# Altium PCB ESP32_GRBL_3Axis_E0.4_2021-05-28.pcbdoc (part 1 of 2)
Units mil, origin at the board's own origin, x right, y up, seen from the top; angles counter-clockwise.
Board outline 5724.41 x 4938.03 mil, 2 copper layers (Top Layer, Bottom Layer); 111 components, 119 nets, 457 pads, 133 vias.
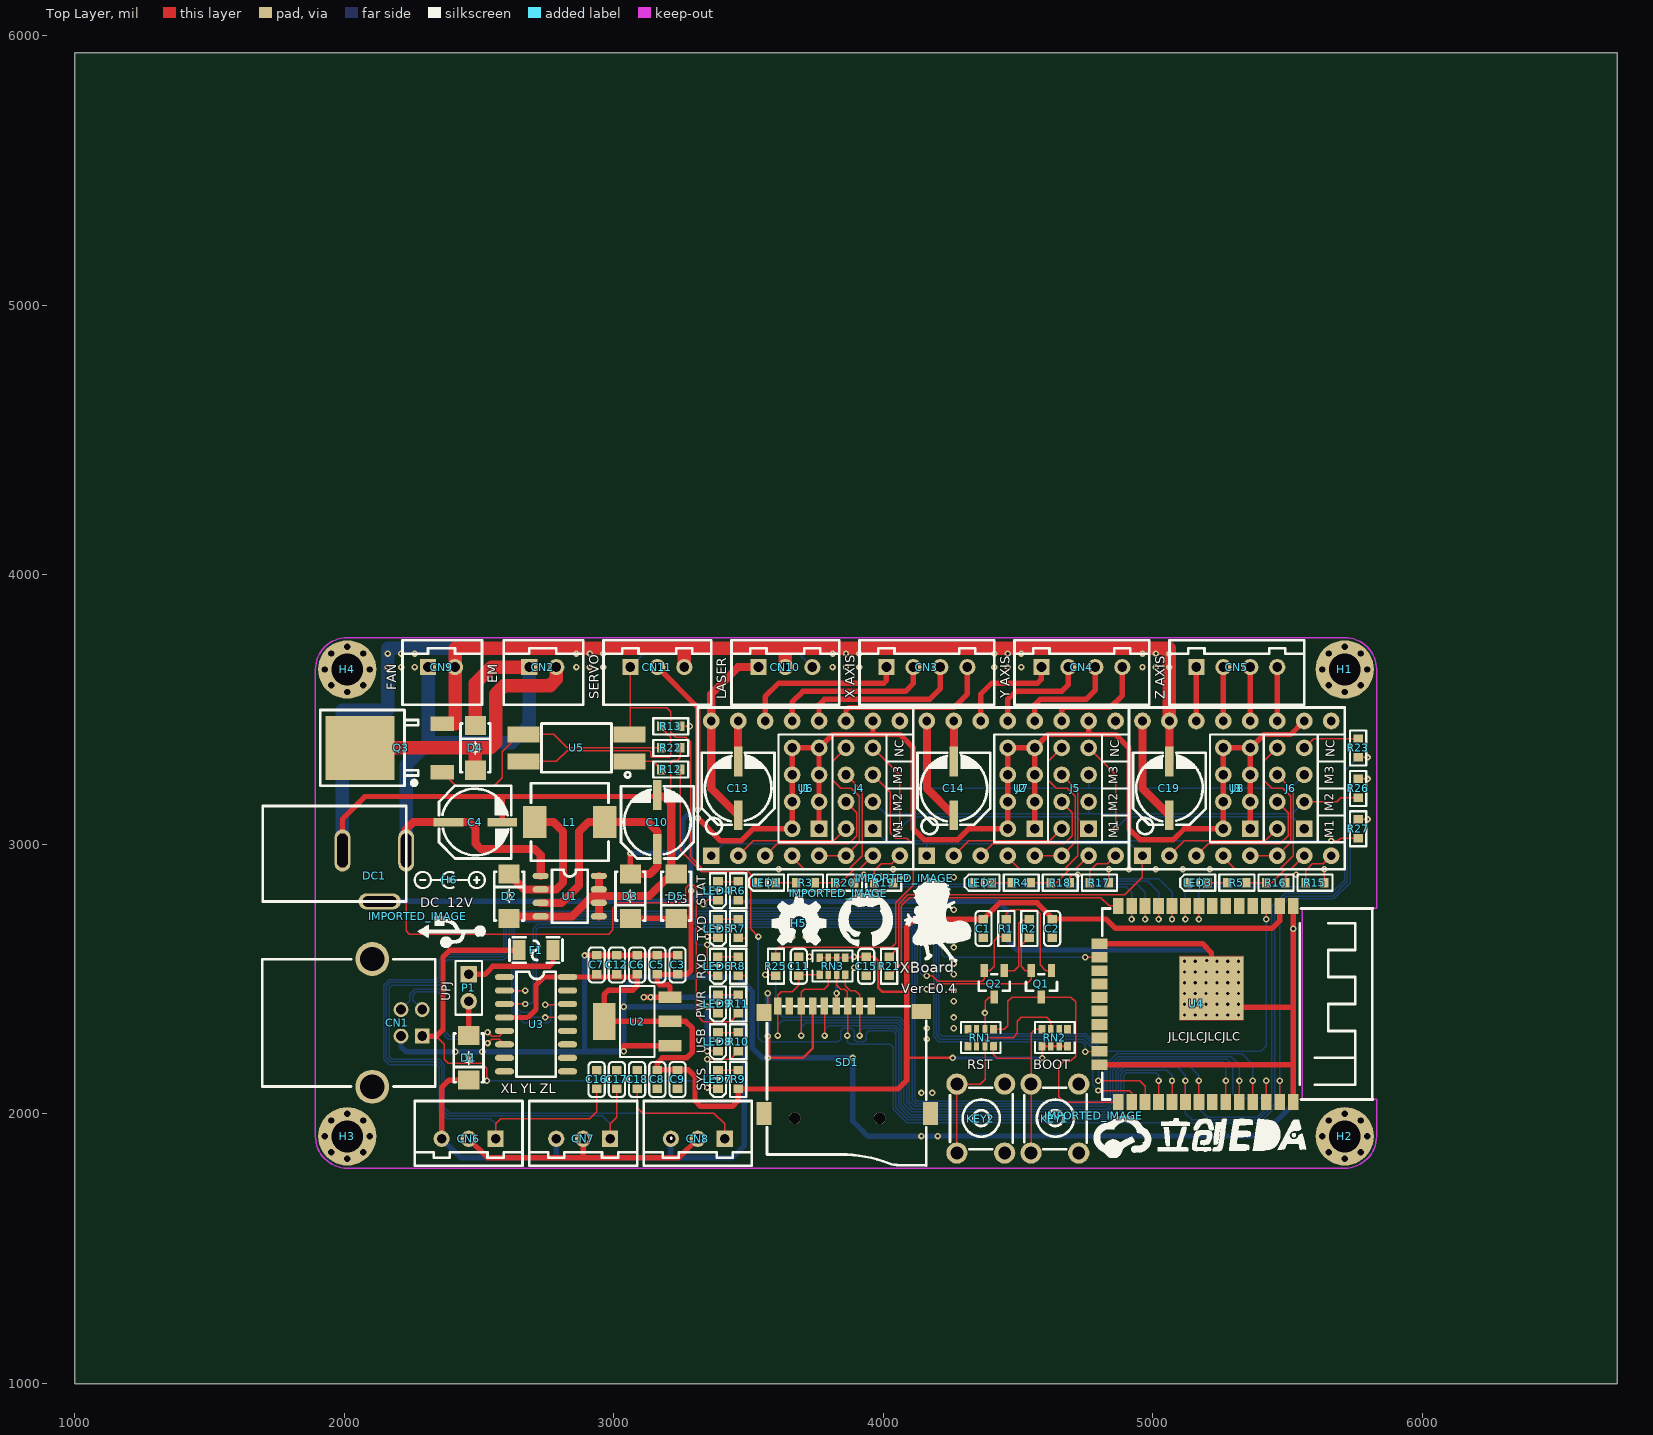
[diagram p0: Top Layer view]
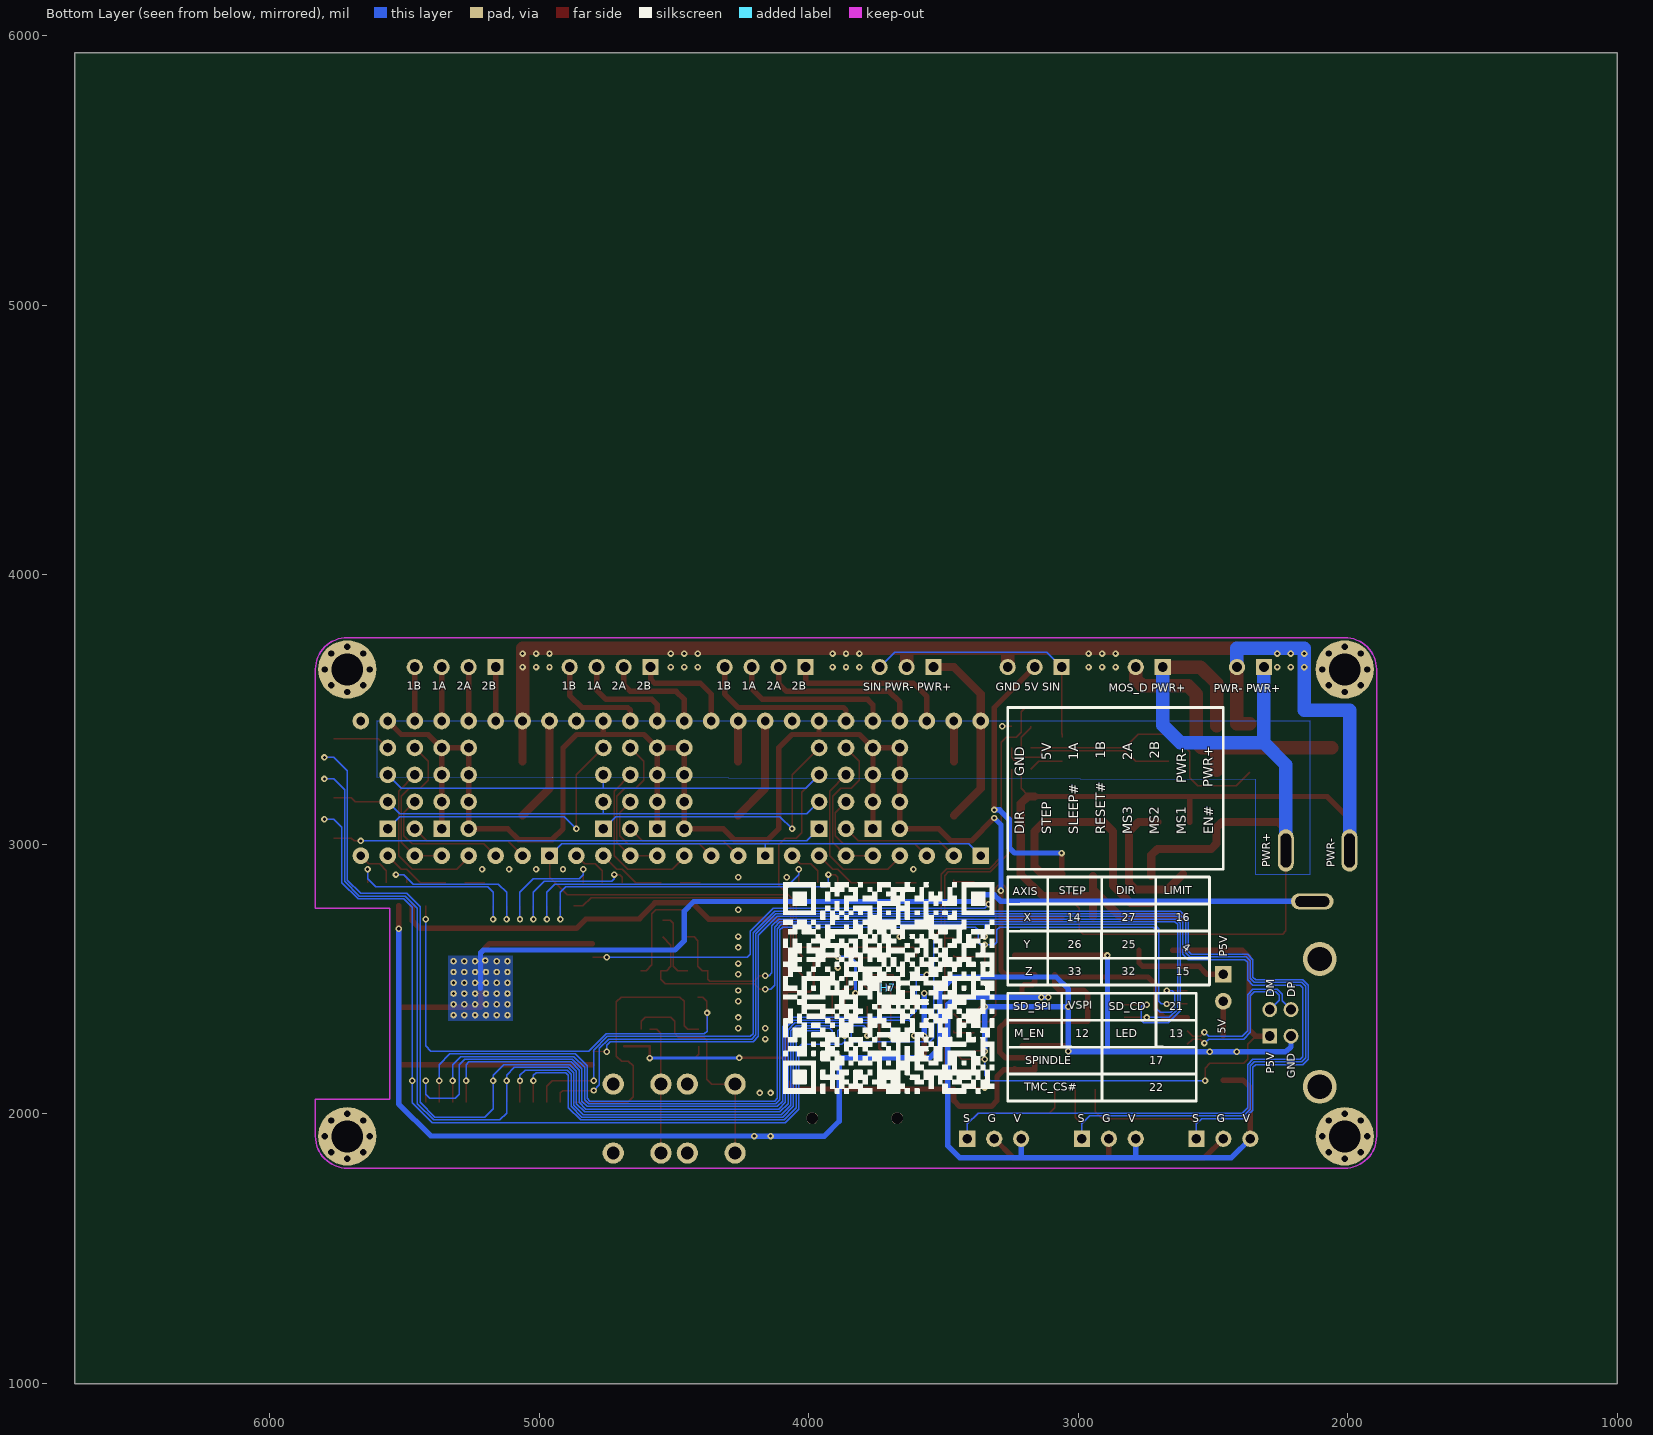
[diagram p1: Bottom Layer view, seen from below]

## Layer stack, top to bottom
Top Layer: signal copper (thickness not stored)
Dielectric: dielectric 12.6, FR-4, Dk 4.8
Bottom Layer: signal copper (thickness not stored)

## Board outline
6724.41,1000 1000,1000 1000,5938.03 6724.41,5938.03

## Components (designator, comment, footprint, x,y, rotation, side; value= is the part's Value field where it differs from the comment)
C1 "10uF" C0603 4372.25,2688.03 r270 top
C2 "104" C0603 4627.25,2688.03 r270 top
C3 "10uF" C0603 3237.25,2553.03 r270 top
C4 "100uF(35V)" CAP-D6.3XH5.5 2487.21,3083.03 r180 top
C5 "104" C0603 3162.25,2553.03 r270 top
C6 "10uF" C0603 3087.25,2553.03 r270 top
C7 "104" C0603 2937.21,2553.08 r270 top
C8 "10uF" C0603 3162.15,2128.13 r90 top
C9 "104" C0603 3237.15,2128.13 r90 top
C10 "180uF(16V)" CAP-D6.3XH5.5 3162.21,3083.03 r270 top
C11 "104" C0603 3687.25,2548.03 r270 top
C12 "1uF" C0603 3012.21,2553.08 r270 top
C13 "100uF(35V)" CAP-D6.3XH5.5 3462.21,3208.03 r270 top
C14 "100uF(35V)" CAP-D6.3XH5.5 4262.21,3208.03 r270 top
C15 "104" C0603 3937.25,2548.03 r90 top
C16 "104" C0603 2937.25,2128.03 r270 top
C17 "104" C0603 3012.25,2128.03 r270 top
C18 "104" C0603 3087.15,2128.13 r270 top
C19 "100uF(35V)" CAP-D6.3XH5.5 5062.21,3208.03 r270 top
CN1 "USB-BF90" USB-B_4PIN-FEMALE_BF90 2197.19,2338.04 r180 top
CN2 "XH2.54-2A" XH2.54-2A 2737.21,3658.03 r0 top
CN3 "XH2.54-4AW" XH2.54-4A 4162.21,3658.03 r0 top
CN4 "XH2.54-4AW" XH2.54-4A 4737.21,3658.03 r0 top
CN5 "XH2.54-4AW" XH2.54-4A 5312.21,3658.03 r0 top
CN6 "XH2.54-3A" XH2.54-3A 2462.21,1908.03 r180 top
CN7 "XH2.54-3A" XH2.54-3A 2887.21,1908.03 r180 top
CN8 "XH2.54-3A" XH2.54-3A 3312.21,1908.03 r180 top
CN9 "XH2.54-2A" XH2.54-2A 2361.51,3658.03 r0 top
CN10 "XH2.54-3A" XH2.54-3A 3637.21,3658.03 r0 top
CN11 "XH2.54-3A" XH2.54-3A 3162.21,3658.03 r0 top
D1 "SS34" SMA_L4.4-W2.8-LS5.4-RD 2462.21,2208.03 r90 top
D2 "SS34" SMA_L4.4-W2.8-LS5.4-RD 2612.21,2808.07 r270 top
D3 "SS34" SMA_L4.4-W2.8-LS5.4-RD 3062.21,2808.07 r90 top
D4 "SS34" SMA_L4.4-W2.8-LS5.4-RD 2487.21,3358.07 r270 top
D5 "SMAJ5.0A" SMAJ5.0A 3232.21,2808.08 r0 top
DC1 "DC005" DC-IN-TH_DC-005 2112.22,2883.04 r0 top
F1 "FSMD012-1206-R" F1206 2712.21,2608.08 r0 top
H1 "安装孔" M3定位孔_2020年6月11日 5712.61,3649.23 r0 top
H2 "安装孔" M3定位孔_2020年6月11日 5712.61,1916.93 r0 top
H3 "安装孔" M3定位孔_2020年6月11日 2011.81,1916.93 r0 top
H4 "安装孔" M3定位孔_2020年6月11日 2011.81,3649.23 r0 top
H5 "OSHW" OSHW_TS 3687.21,2708.03 r0 top
H6 "DC" DC_LOGO 2392.21,2868.08 r0 top
H7 "QR" XBOARD交流群二维码 3704.72,2468.12 r0 bottom
IMPORTED_IMAGE "IMPORTED_IMAGE" IMPORTED_IMAGE 2272.64,2734.4 r0 top
IMPORTED_IMAGE "IMPORTED_IMAGE" IMPORTED_IMAGE 4078.32,2875.28 r0 top
IMPORTED_IMAGE "IMPORTED_IMAGE" IMPORTED_IMAGE 4781.42,1993.58 r0 top
IMPORTED_IMAGE "IMPORTED_IMAGE" IMPORTED_IMAGE 3834.3,2819.34 r0 top
J1 "HDR-M-2.54_2x4" HDR-M-2.54_2X4 3712.21,3208.03 r90 top
J2 "HDR-M-2.54_2x4" HDR-M-2.54_2X4 4512.21,3208.03 r90 top
J3 "HDR-M-2.54_2x4" HDR-M-2.54_2X4 5312.21,3208.03 r90 top
J4 "HDR-M-2.54_2x4" HDR-M-2.54_2X4 3912.21,3208.03 r90 top
J5 "HDR-M-2.54_2x4" HDR-M-2.54_2X4 4712.21,3208.03 r90 top
J6 "HDR-M-2.54_2x4" HDR-M-2.54_2X4 5512.21,3208.03 r90 top
KEY1 "button6*6*8.5" KEY-TH_4P-L6.0-W6.0-P4.50 4637.21,1983.08 r270 top
KEY2 "button6*6*8.5" KEY-TH_4P-L6.0-W6.0-P4.50 4362.21,1983.08 r270 top
L1 "68uH" L-SMD-7.3X7.3 2837.21,3083.07 r0 top
LED1 "LED-0603_Violet" LED0603_VIOLET 3567.21,2858.08 r180 top
LED2 "LED-0603_Violet" LED0603_VIOLET 4367.21,2858.08 r180 top
LED3 "LED-0603_Violet" LED0603_VIOLET 5167.21,2858.08 r180 top
LED4 "LED-0603_R" LED0603_RED 3387.24,2828.1 r270 top
LED5 "LED-0603_G" LED0603_GREEN 3387.24,2688.1 r270 top
LED6 "LED-0603_Y" LED0603_YELLOW 3387.21,2548.08 r270 top
LED7 "LED-0603_B" LED0603_BLUE 3387.24,2128.1 r270 top
LED8 "LED-0603_B" LED0603_BLUE 3387.24,2268.1 r270 top
LED9 "LED-0603_B" LED0603_BLUE 3387.24,2408.1 r270 top
P1 "Header-Female-2.54_1x2" HDR-1X2/2.54 2462.21,2468.03 r270 top
Q1 "S8050" SOT-23-3_L2.9-W1.3-P1.90-LS2.4-BR 4587.21,2483.07 r90 top
Q2 "S8050" SOT-23-3_L2.9-W1.3-P1.90-LS2.4-BR 4412.21,2483.07 r90 top
Q3 "IRLR7843TRPBF" TO-252-2_L6.5-W6.1-P4.58-LS10.0-BR 2212.21,3358.07 r0 top
R1 "10k" R0603 4457.24,2688.03 r270 top
R2 "10k" R0603 4542.24,2688.03 r270 top
R3 "2k" R0603 3712.21,2858.08 r0 top
R4 "2k" R0603 4512.21,2858.08 r0 top
R5 "2k" R0603 5312.24,2858.03 r0 top
R6 "2k" R0603 3462.24,2828.03 r270 top
R7 "1k" R0603 3462.24,2688.03 r90 top
R8 "1k" R0603 3462.24,2548.03 r90 top
R9 "1k" R0603 3462.24,2128.03 r90 top
R10 "2k" R0603 3462.24,2268.03 r90 top
R11 "10k" R0603 3462.24,2408.03 r90 top
R12 "510" R0603 3212.24,3278.03 r0 top
R13 "10k" R0603 3212.24,3438.03 r0 top
R15 "1k" R0603 5602.21,2858.08 r0 top
R16 "1k" R0603 5457.21,2858.08 r0 top
R17 "1k" R0603 4802.21,2858.08 r0 top
R18 "1k" R0603 4657.21,2858.08 r0 top
R19 "1k" R0603 4002.21,2858.08 r0 top
R20 "1k" R0603 3857.21,2858.08 r0 top
R21 "1k" R0603 4022.24,2548.03 r270 top
R22 "100k" R0603 3212.24,3358.03 r0 top
R23 "1k" R0603 5762.21,3358.03 r270 top
R25 "1k" R0603 3602.21,2548.03 r270 top
R26 "1k" R0603 5762.21,3208.03 r90 top
R27 "1k" R0603 5762.21,3058.03 r90 top
RN1 "470" RES-ARRAY-SMD_0603-8P-L3.2-W1.6-BL 4362.21,2283.03 r0 top
RN2 "10K" RES-ARRAY-SMD_0603-8P-L3.2-W1.6-BL 4637.21,2283.03 r0 top
RN3 "10K" RES-ARRAY-SMD_0603-8P-L3.2-W1.6-BL 3812.21,2548.07 r0 top
SD1 "Micro SD Card" MICRO-SD 3867.21,2200.93 r270 top
U1 "XL1509-5.0E" SOIC-8_L5.0-W4.0-P1.27-LS6.0-BL 2837.21,2808.07 r270 top
U2 "AMS1117-3.3_C165482" SOT-223_L6.5-W3.5-P2.30-LS7.0-BR 3087.21,2343.08 r0 top
U3 "CH340C" SOP-16_L10.0-W3.9-P1.27-LS6.0-BL 2712.21,2333.03 r270 top
U4 "ESP-WROOM-32" ESP-WROOM-32D 5162.21,2408.03 r270 top
U5 "EL817S(C)(TU)-F" OPTO-SMD-4_L4.6-W6.5-P2.54-LS10.3-TL 2862.19,3358.1 r180 top
U6 "4988" "MOTOR DRIVER  4988/8825" 3662.21,3208.03 r0 top
U7 "4988" "MOTOR DRIVER  4988/8825" 4462.21,3208.03 r0 top
U8 "4988" "MOTOR DRIVER  4988/8825" 5262.21,3208.03 r0 top
? "" ? 3862.21,3855.38 r0 top
? "" ? 5922.62,2783.08 r0 top
? "" ? 1745.58,2783.09 r0 top
? "" ? 3862.2,1650.42 r0 top

## Footprints (in the part's own frame and the unit in brackets; to place one, negate y for a bottom-side part, rotate by r counter-clockwise, add the part's x,y. Pads: shape width x height; smd on the part's side, far side on the other; paste and mask are expansions set on the pad)
C0603 [mm]
  rect 0.8x0.9 smd: 1(-0.889,0) 2(0.889,0)
  silkscreen extent -1.65,-0.76 1.65,0.76
CAP-D6.3XH5.5 [mm]
  rect 2.8x0.8 smd: 1(2.54,0) 2(-2.54,0)
  silkscreen extent -3.37,-3.43 3.43,3.43
DC-IN-TH_DC-005 [mm]
  oval 4x1.5 hole 1 slot 3.2 at 0 deg: 2(0.5,-2.4)
  oval 1.5x4 hole 1 slot 3.2 at 90 deg: 3(-3,2.4) 4(3,2.4)
  silkscreen extent -10.5,-2.4 3,6.6
DC_LOGO [mil]
  silkscreen extent -130,-30 130,30
ESP-WROOM-32D [mil]
  rect 59.1x39.4 smd: 1(-364,359.5) 2(-364,309.5) 3(-364,259.5) 4(-364,209.5) 5(-364,159.5) 6(-364,109.5) 7(-364,59.5) 8(-364,9.5) 9(-364,-40.5) 10(-364,-90.5) 11(-364,-140.5) 12(-364,-190.5) 13(-364,-240.5) 14(-364,-290.5) 25(364,-290.5) 26(364,-240.5) 27(364,-190.5) 28(364,-140.5) 29(364,-90.5) 30(364,-40.5) 31(364,9.5) 32(364,59.5) 33(364,109.5) 34(364,159.5) 35(364,209.5) 36(364,259.5) 37(364,309.5) 38(364,359.5)
  rect 39.4x59.1 smd: 15(-224,-359.5) 16(-174,-359.5) 17(-124,-359.5) 18(-74,-359.5) 19(-24,-359.5) 20(26,-359.5) 21(76,-359.5) 22(126,-359.5) 23(176,-359.5) 24(226,-359.5)
  rect 236.2x236.2 smd: 39(-58.72,56.01)
  silkscreen extent -354,-350 354,655
F1206 [mm]
  rect 1.2x1.9 smd: 1(-1.6,0) 2(1.6,0)
  silkscreen extent -2.5,-1.2 2.5,1.2
HDR-1X2/2.54 [mil]
  rect 62x62 hole 35: 1(-50,0)
  round 62 hole 35: 2(50,0)
  silkscreen extent -100,-49 100,50
HDR-M-2.54_2X4 [mil]
  rect 62x62 hole 35: 1(-150,-50)
  round 62 hole 35: 2(-150,50) 3(-50,-50) 4(-50,50) 5(50,-50) 6(50,50) 7(150,-50) 8(150,50)
  silkscreen extent -200,-100 200,100
IMPORTED_IMAGE [mil]
  silkscreen extent 0,-118 252,0
KEY-TH_4P-L6.0-W6.0-P4.50 [mm]
  round 2 hole 1.2: 1(-3.25,-2.25) 2(3.25,-2.25) 3(3.25,2.25) 4(-3.25,2.25)
  silkscreen extent -2.9,-2.9 2.9,3
L-SMD-7.3X7.3 [mm]
  rect 2.2x3 smd: 1(-3.3,0) 2(3.3,0)
  silkscreen extent -3.65,-3.65 3.65,3.65
LED0603_BLUE [mm]
  rect 0.8x0.9 smd: 1(-0.889,0) 2(0.889,0)
  silkscreen extent -1.65,-0.76 1.65,0.76
LED0603_GREEN [mm]
  rect 0.8x0.9 smd: 1(-0.889,0) 2(0.889,0)
  silkscreen extent -1.65,-0.76 1.65,0.76
LED0603_RED [mm]
  rect 0.8x0.9 smd: 1(-0.889,0) 2(0.889,0)
  silkscreen extent -1.65,-0.76 1.65,0.76
LED0603_VIOLET [mm]
  rect 0.8x0.9 smd: 1(-0.889,0) 2(0.889,0)
  silkscreen extent -1.65,-0.76 1.65,0.76
LED0603_YELLOW [mm]
  rect 0.8x0.9 smd: 1(-0.889,0) 2(0.889,0)
  silkscreen extent -1.65,-0.76 1.65,0.76
M3定位孔_2020年6月11日 [mm]
  round 0.6 hole 0.6: 1(-2.125,0) 1(-1.5,-1.5) 1(-1.5,1.5) 1(0,-2.125) 1(0,2.125) 1(1.5,-1.5) 1(1.5,1.5) 1(2.125,0)
  round 5.5 hole 3: 1(0,0)
MICRO-SD [mil]
  rect 63x27.6 smd: 1(-199,89) 2(-199,45) 3(-199,2) 4(-199,-41) 5(-199,-85) 6(-199,-128) 7(-199,-171) 8(-199,-215) 9(-199,-258)
  rect 63x55.1 smd: 10(-175,-309)
  rect 86.6x55.1 smd: 11(199,-309) 12(199,309)
  rect 55.1x70.9 smd: 13(-179,274)
  round 43.31 hole 43.31 unplated: ""(216.54,120.08) ""(216.54,-194.88)
  silkscreen extent -199,-298 392,293
"MOTOR DRIVER  4988/8825" [mil]
  rect 62x62 hole 32: 1(-300,-250)
  round 62 hole 32: 2(-200,-250) 3(-100,-250) 4(0,-250) 5(100,-250) 6(200,-250) 7(300,-250) 8(400,-250) 9(400,250) 10(300,250) 11(200,250) 12(100,250) 13(0,250) 14(-100,250) 15(-200,250) 16(-300,250)
  silkscreen extent -350,-300 450,300
OPTO-SMD-4_L4.6-W6.5-P2.54-LS10.3-TL [mm]
  rect 3x1.5 smd: 1(-5,1.27) 2(-5,-1.27) 3(5,-1.27) 4(5,1.27)
  silkscreen extent -5.08,-2.3 3.3,2.79
OSHW_TS [mil]
  silkscreen extent -101,-82 102,102
R0603 [mm]
  rect 0.8x0.9 smd: 1(-0.889,0) 2(0.889,0)
  silkscreen extent -1.65,-0.76 1.65,0.76
RES-ARRAY-SMD_0603-8P-L3.2-W1.6-BL [mm]
  rect 0.65x0.8 smd: 1(-1.2,-0.8) 4(1.2,-0.8) 5(1.2,0.8) 8(-1.2,0.8)
  rect 0.5x0.8 smd: 2(-0.4,-0.8) 3(0.4,-0.8) 6(0.4,0.8) 7(-0.4,0.8)
  silkscreen extent -1.87,-1.45 1.87,1.47
SMA_L4.4-W2.8-LS5.4-RD [mm]
  rect 1.8x2 smd: 1(-2.1,0) 2(2.1,0)
  silkscreen extent -2.3,-1.4 2.3,1.4
SMAJ5.0A [mm]
  rect 2x1.8 smd: 1(0,-2.1) 2(0,2.1)
  silkscreen extent -1.4,-2.3 1.4,2.3
SOIC-8_L5.0-W4.0-P1.27-LS6.0-BL [mm]
  oval 0.6x1.52 smd: 1(-1.905,-2.74) 2(-0.635,-2.74) 3(0.635,-2.74) 4(1.905,-2.74) 5(1.905,2.74) 6(0.635,2.74) 7(-0.635,2.74) 8(-1.905,2.74)
  silkscreen extent -2.49,-1.67 2.5,1.7
SOP-16_L10.0-W3.9-P1.27-LS6.0-BL [mm]
  oval 0.6x1.8 smd: 1(-4.445,-2.972) 2(-3.175,-2.972) 3(-1.905,-2.972) 4(-0.635,-2.972) 5(0.635,-2.972) 6(1.905,-2.972) 7(3.175,-2.972) 8(4.445,-2.972) 9(4.445,2.972) 10(3.175,2.972) 11(1.905,2.972) 12(0.635,2.972) 13(-0.635,2.972) 14(-1.905,2.972) 15(-3.175,2.972) 16(-4.445,2.972)
  silkscreen extent -4.95,-1.85 4.95,1.85
SOT-23-3_L2.9-W1.3-P1.90-LS2.4-BR [mm]
  rect 1.25x0.7 smd: 1(1.25,-0.95) 2(1.25,0.95) 3(-1.25,0)
  silkscreen extent -0.65,-1.46 0.9,1.46
SOT-223_L6.5-W3.5-P2.30-LS7.0-BR [mil]
  rect 85x43 smd: 1(122,-90.5) 2(122,0.5) 3(122,90.5)
  rect 85x138 smd: 4(-122,0.5)
  silkscreen extent -64,-132 64,132
TO-252-2_L6.5-W6.1-P4.58-LS10.0-BR [mm]
  rect 2.2x1.35 smd: 1(3.876,-2.29) 3(3.871,2.29)
  rect 6.5x6 smd: 4(-3.876,0)
  silkscreen extent -7.64,-3.57 1.61,3.57
USB-B_4PIN-FEMALE_BF90 [mm]
  rect 1.4x1.4 hole 0.92: 1(-2.355,1.25)
  round 1.4 hole 0.92: 2(-2.355,-1.25) 3(-0.355,-1.25) 4(-0.355,1.25)
  round 3.2 hole 2.3: SH1(2.355,6.02) SH2(2.355,-6.02)
  silkscreen extent -3.6,-6 12.7,6
XBOARD交流群二维码 [mil]
  silkscreen extent -392,-391 391,391
XH2.54-2A [mil]
  rect 60x60 hole 36: 1(-50,0)
  round 60 hole 36: 2(50,0)
  silkscreen extent -145,-140 150,100
XH2.54-3A [mil]
  rect 60x60 hole 36: 1(-100,0)
  round 60 hole 36: 2(0,0) 3(100,0)
  silkscreen extent -200,-140 200,100
XH2.54-4A [mil]
  rect 60x60 hole 36: 1(-150,0)
  round 60 hole 36: 2(-50,0) 3(50,0) 4(150,0)
  silkscreen extent -250,-140 250,100
? [mil]

## Free pads (board coordinates)
  round 24 hole 12: ""(5118.22,2366.75) ""(5118.22,2406.75) ""(5118.22,2446.75) ""(5118.22,2486.75) ""(5118.22,2526.75) ""(5118.22,2566.75) ""(5158.22,2366.75) ""(5158.22,2406.75) ""(5158.22,2446.75) ""(5158.22,2486.75) ""(5158.22,2526.75) ""(5158.22,2566.75) ""(5198.22,2366.75) ""(5198.22,2406.75) ""(5198.22,2446.75) ""(5198.22,2486.75) ""(5198.22,2526.75) ""(5200.91,2569.43) ""(5238.22,2366.75) ""(5238.22,2406.75) ""(5238.22,2446.75) ""(5238.22,2486.75) ""(5238.22,2526.75) ""(5238.22,2566.75) ""(5278.22,2366.75) ""(5278.22,2406.75) ""(5278.22,2446.75) ""(5278.22,2486.75) ""(5278.22,2526.75) ""(5278.22,2566.75) ""(5318.22,2366.75) ""(5318.22,2406.75) ""(5318.22,2446.75) ""(5318.22,2486.75) ""(5318.22,2526.75) ""(5318.22,2566.75)

## Via types
v1: diameter 24, hole 12, Top Layer to Bottom Layer, 133 vias

## Nets (pads, with @x,y where several pads share a name; then routed paths per layer and width w, separated by ;. In a path a pad name is that pad's centre, name@x,y a point inside that pad or via, vN(x,y) a via of type N, cw(c..) or ccw(c..) an arc to the next point about the centre after c; other vN are vias at no path point)
3V3: C1.1 C2.1 C6.2 C7.2 C8.2 C9.2 C12.2 C15.2 R6.2 R7.1 R8.1 R9.1 R12.2 RN2.1 RN2.2 RN2.3 RN2.4 RN3.5 RN3.6 RN3.7 RN3.8 SD1.4 U2.2 U2.4 U3.4 U3.16 U4.2 | length 7518.8
  Top Layer w5: R12.2@3247.61,3278.03 3247.61,2977.73 3326.71,2898.63 3482.01,2898.63 3496.21,2884.43 3496.21,2788.03 ; R9.1@3462.24,2092.6 3496.21,2092.6 3496.21,2512.6 ; R8.1@3462.24,2512.6 3496.21,2512.6 ; R7.1@3462.24,2652.6 3496.21,2652.6 ; R6.2@3462.24,2792.59 3462.24,2788.03 3496.21,2788.03 ; RN3.8@3764.97,2579.57 3888.7,2579.57 v1(3892.21,2583.08) ; 3496.21,2512.6 3496.21,2652.6 ; 3496.21,2652.6 3496.21,2788.03
  Top Layer w10: SD1.4@3826.21,2399.93 v1@3827.21,2448.03 ; v1(3892.21,2583.08) 3937.25,2583.08 C15.2@3937.25,2583.47 ; C15.2@3937.21,2583.43 3966.81,2583.43 3982.21,2568.03 3982.21,2468.03 3997.21,2453.03 4087.21,2453.03 ; 4087.21,2208.03 v1(4258.21,2208.03) ; v1(4590.01,2207.34) 4590.01,2251.63 RN2.4@4684.41,2251.63
  Top Layer w20: U3.4@2595.21,2358.03 2682.21,2358.03 2712.21,2388.03 2712.21,2478.03 2742.21,2508.03 C6.2@3087.21,2508.03 ; U2.4@2965.21,2343.53 2965.21,2442.63 2981.81,2459.23 3071.81,2459.23 3087.21,2474.63 C6.2@3087.21,2517.63 ; U2.4@2965.21,2343.58 3194.26,2343.58 U2.2@3209.21,2343.58 ; C8.2@3162.17,2163.57 3232.25,2163.57 C9.2@3237.21,2168.53 ; C8.2@3162.21,2163.53 3162.21,2189.63 3180.61,2208.03 3270.61,2208.03 3292.21,2229.63 3292.21,2318.83 3267.51,2343.53 U2.2@3209.21,2343.53 ; C9.2@3237.21,2163.53 3277.41,2163.53 3301.81,2139.13 3301.81,2049.23 3323.01,2028.03 3440.61,2028.03 3462.21,2049.63 3462.21,2092.63 4055.21,2092.63 4087.21,2124.63 4087.21,2694.63 4115.61,2723.03 C1.1@4372.25,2723.02 ; C1.1@4372.21,2723.53 4431.71,2783.03 4571.41,2783.03 4627.21,2727.23 4627.21,2723.53 4827.11,2723.53 4862.61,2688.33 5442.81,2688.33 5471.71,2717.23 U4.2@5471.71,2772.33
  Bottom Layer w10: v1@3827.21,2448.03 3827.21,2563.03 3847.21,2583.03 v1@3892.21,2583.03 ; v1(4258.21,2208.03) 4258.21,2207.33 v1(4590.01,2207.34)
  other v1: 3827.21,2448.08
5V: C3.2 C5.2 CN6.3 CN7.3 CN8.3 D1.1 D3.1 D5.1 J1.1 J1.2 J1.3 J1.4 J1.5 J1.6 J1.7 J1.8 J2.1 J2.2 J2.3 J2.4 J2.5 J2.6 J2.7 J2.8 J3.1 J3.2 J3.3 J3.4 J3.5 J3.6 J3.7 J3.8 U2.3 U6.10 U7.10 U8.10 | length 8859.9
  Top Layer w20: CN6.3@2362.21,1908.03 2362.21,2098.03 2389.51,2125.33 D1.1@2462.21,2125.33 ; D3.1@3062.21,2725.4 3287.21,2725.43 ; v1(3112.21,2433.08) v1(3137.21,2433.08) 3137.21,2433.58 U2.3@3209.21,2433.58 U2.3@3209.21,2447.03 ; U2.3@3209.21,2433.53 3209.21,2471.83 3201.81,2479.23 3171.81,2479.23 3162.21,2488.83 3162.21,2517.63 3271.71,2517.63 3287.21,2533.03 3287.21,2725.43 ; v1(3287.21,2828.08) 3287.21,2725.43 ; v1@3314.22,3096.07 3397.26,3013.03 3472.21,3013.03 3517.21,3058.03 J1.2@3662.21,3058.03 J1.8@3662.21,3358.03 J1.7@3762.21,3358.03 ; J1.1@3762.21,3058.03 J1.7@3762.21,3358.03 ; J2.1@4562.21,3058.03 J2.7@4562.21,3358.03 ; J3.1@5362.21,3058.03 J3.7@5362.21,3358.03 ; U8.10@5562.21,3458.03 5512.21,3408.03 5412.21,3408.03 J3.7@5362.21,3358.03 ; J1.7@3762.21,3358.03 3812.21,3408.03 3962.21,3408.03 ; 3962.21,3408.03 U6.10@3962.21,3458.03 3962.21,3408.03 ; 3962.21,3408.03 4062.21,3408.03 4112.21,3358.03 4112.21,3058.03 4152.21,3018.03 4277.21,3018.03 4317.21,3058.03 J2.2@4462.21,3058.03 J2.8@4462.21,3358.03 J2.7@4562.21,3358.03 ; J2.7@4562.21,3358.03 4612.21,3408.03 4762.21,3408.03 ; 4762.21,3408.03 U7.10@4762.21,3458.03 4762.21,3408.03 ; 4762.21,3408.03 4862.21,3408.03 4912.21,3358.03 4912.21,3058.03 4952.21,3018.03 5077.21,3018.03 5117.21,3058.03 J3.2@5262.21,3058.03 J3.8@5262.21,3358.03 J3.7@5362.21,3358.03
  Bottom Layer w20: CN6.3@2362.21,1908.03 2432.21,1838.03 2787.21,1838.03 ; 2787.21,1854.03 2787.21,1838.03 ; CN7.3@2787.21,1908.03 2787.21,1838.03 ; v1@3112.21,2433.03 3458.01,2433.03 3484.21,2406.83 3484.21,1881.63 3440.71,1838.03 3212.21,1838.03 ; v1(3287.21,2828.08) 3287.21,3073.08 v1(3312.21,3098.08) ; 2787.21,1838.03 3212.21,1838.03 ; 3212.21,1838.03 CN8.3@3212.21,1908.03 3212.21,1838.03
_SPI_MISO: J6.7 R23.1 | length 214.5
  Top Layer w5: J6.7@5562.21,3358.03 5597.21,3393.02 R23.1@5762.21,3393.02
_SPI_MOSI: J4.1 R27.1 | length 1822.8
  Top Layer w5: v1(5662.21,3013.03) 5687.21,3013.03 5697.21,3023.03 R27.1@5762.21,3023.03
  Bottom Layer w5: J4.1@3962.21,3058.03 4007.21,3013.03 v1(5662.21,3013.03)
_SPI_SCLK: J4.3 J5.3 J6.3 R26.1 | length 1933.5
  Top Layer w5: J6.3@5562.21,3158.03 5682.21,3158.03 5697.21,3173.03 R26.1@5762.21,3173.03
  Bottom Layer w5: J4.3@3962.21,3158.03 4007.21,3113.03 4762.21,3113.03 ; J6.3@5562.21,3158.03 5517.21,3113.03 4762.21,3113.03 ; 4762.21,3113.03 J5.3@4762.21,3158.03 4762.21,3113.03
_SPI_TMC_CS#: J4.5 J5.5 J6.5 R25.1 | length 2959.3
  Top Layer w5: R25.1@3602.21,2583.02 3602.21,2608.03 3612.21,2618.03 4032.21,2618.03 4047.21,2633.03 4047.21,2783.03 4112.21,2848.03 4112.21,2998.03 4087.21,3023.03 4047.21,3023.03 4027.21,3043.03 4027.21,3193.03 J4.5@3962.21,3258.03
  Bottom Layer w5: J4.5@3962.21,3258.03 4012.21,3208.03 4762.21,3208.03 ; J6.5@5562.21,3258.03 5512.21,3208.03 4762.21,3208.03 ; 4762.21,3208.03 J5.5@4762.21,3258.03 4762.21,3208.03
D1_2: D1.2 P1.2 | length 127.3
  Top Layer w20: D1.2@2462.21,2290.7 P1.2@2462.21,2418.03
ESP_BOOT: Q1.3 RN1.5 U4.25 | length 1041.5
  Top Layer w5: RN1.5@4409.41,2314.53 4448.71,2314.53 4462.21,2328.03 4462.21,2418.03 4478.11,2433.93 Q1.3@4587.21,2433.88 ; Q1.3@4580.41,2433.93 4696.31,2433.93 4713.71,2416.53 4713.71,2214.53 4694.51,2195.33 4669.51,2195.33 4652.21,2178.03 4652.21,2063.03 4671.21,2044.03 U4.25@4871.71,2044.03
ESP_RST: Q2.3 RN1.6 U4.3 | length 1814.7
  Top Layer w5: RN1.6@4377.96,2314.53 4378.01,2418.83 4393.11,2433.93 Q2.3@4412.21,2433.88 ; v1(5421.71,2722.03) U4.3@5421.71,2772.03
  Bottom Layer w5: v1(4377.71,2375.03) 4377.71,2307.53 4387.21,2298.03 4752.21,2298.03 4817.21,2233.03 5402.21,2233.03 5421.71,2252.53 v1(5421.71,2722.03)
ESP_UART0_RXD: LED6.2 U3.2 U4.34 | length 4339.8
  Top Layer w5: U3.2@2595.21,2458.03 v1(2672.21,2458.03) ; v1(3347.21,2628.08) 3347.21,2528.03 3362.15,2513.09 LED6.2@3387.21,2513.08 ; U4.34@5321.71,2044.03 v1@5321.71,2123.03
  Bottom Layer w5: v1(2672.21,2458.03) 2652.21,2458.03 2642.21,2448.03 2642.21,2393.03 2657.21,2378.03 2697.21,2378.03 2712.21,2393.03 2712.21,2683.03 2722.21,2693.03 3292.21,2693.03 3302.21,2683.03 3302.21,2638.03 3312.16,2628.08 v1(3347.21,2628.08) 3362.26,2628.08 3372.21,2638.03 3372.21,2683.03 3382.21,2693.03 4097.21,2693.03 4107.21,2683.03 4107.21,2053.03 4122.21,2038.03 4817.21,2038.03 4832.21,2053.03 4832.21,2173.03 4872.21,2213.03 5292.21,2213.03 5321.71,2183.53 v1@5321.71,2123.03
  other v1: 5321.71,2123.08
ESP_UART0_TXD: LED5.2 U3.3 U4.35 | length 4129.2
  Top Layer w5: U3.3@2595.21,2408.03 v1(2672.21,2408.03) ; v1(3347.21,2658.08) 3347.21,2654.62 LED5.2@3387.21,2654.62 ; U4.35@5371.71,2044.03 v1@5371.71,2123.03
  Bottom Layer w5: v1(2672.21,2408.03) 2692.21,2408.03 2702.21,2418.03 2702.21,2688.03 2717.21,2703.03 3347.21,2703.03 ; v1@5371.71,2123.03 5371.71,2183.53 5332.21,2223.03 4867.21,2223.03 4822.21,2178.03 4822.21,2058.03 4812.21,2048.03 4127.21,2048.03 4117.21,2058.03 4117.21,2688.03 4102.21,2703.03 3347.21,2703.03 ; 3347.21,2703.03 v1(3347.21,2658.08) 3347.21,2703.03
  other v1: 5371.71,2123.08
GND: C1.2 C2.2 C3.1 C4.2 C5.1 C6.1 C7.1 C8.1 C9.1 C10.2 C11.1 C12.1 C13.2 C14.2 C15.1 C16.1 C17.1 C18.1 C19.2 CN1.4 CN1.SH1 CN1.SH2 CN6.2 CN7.2 CN8.2 CN9.2 CN10.2 CN11.3 D2.2 D5.2 DC1.2 DC1.3 KEY1.3 KEY1.4 KEY2.3 KEY2.4 LED1.2 LED2.2 LED3.2 LED7.2 LED8.2 LED9.2 pad. Q3.3 R22.2 SD1.6 SD1.10 SD1.11 SD1.12 SD1.13 U1.4 U1.5 U1.6 U1.7 U1.8 U2.1 U3.1 U4.1 U4.15 U4.24 U4.38 U4.39 U6.9 U6.15 U7.9 U7.15 U8.9 U8.15 | length 22014
  Top Layer w5: C10.2@3162.21,3183.03 3187.21,3183.03 3212.21,3208.03 3212.21,3303.03 3222.21,3313.03 3237.21,3313.03 3247.61,3323.43 R22.2@3247.61,3358.03 ; v1(3347.21,2098.08) 3383.75,2098.08 LED7.2@3387.21,2094.62 ; v1(3347.21,2233.08) 3347.21,2234.62 LED8.2@3387.21,2234.62 ; v1@3347.21,2398.03 3363.8,2398.03 LED9.2@3387.21,2374.62 ; SD1.10@3552.21,2350.73 3572.21,2350.73 v1@3572.21,2448.03
  Top Layer w10: v1@3572.21,2208.03 3702.21,2208.03 3739.11,2245.03 SD1.6@3739.11,2399.93
  Top Layer w20: DC1.3@1994.11,2977.53 1994.11,3094.93 2077.21,3178.03 2587.21,3178.03 ; CN6.2@2462.21,1908.03 2532.21,1838.03 2887.21,1838.03 ; C4.2@2587.21,3083.03 2587.21,3178.03 ; 2887.21,1854.03 2887.21,1838.03 ; CN7.2@2887.21,1908.03 2887.21,1838.03 ; v1(2892.21,2588.08) 2892.64,2588.51 C3.1@3237.22,2588.51 ; v1(3037.21,2233.08) 3037.21,2252.58 U2.1@3209.21,2252.58 ; C10.2@3162.21,3178.03 2587.21,3178.03 ; CN8.2@3312.21,1908.03 3242.21,1838.03 2887.21,1838.03 ; v1(3572.21,2208.08) v1(3572.21,2288.08) ; U4.24@4802.71,2182.03 5521.71,2182.03 5521.71,2269.13 ; U4.15@4802.71,2632.03 5184.01,2632.03 5218.22,2597.82 U4.39@5218.22,2466.75 ; pad.@5200.91,2569.43 5217.71,2552.63 5217.71,2396.03 5521.71,2396.03 ; U4.38@5521.71,2044.03 v1(5521.71,2687.08) U4.1@5521.71,2772.03
  Top Layer w30: D2.2@2612.21,2725.4 2612.21,2733.03 U1.4@2729.31,2733.03 ; U1.4@2729.33,2733.07 2845.08,2733.08 U1.7@2945.08,2833.07 ; U1.5@2945.11,2733.03 U1.7@2945.11,2833.03 ; U1.8@2945.11,2883.03 2945.11,2808.03 3132.11,2808.03 3213.71,2889.63 3213.71,3151.63 3187.31,3178.03 C10.2@3162.21,3178.03 ; C13.2@3462.21,3308.03 U6.15@3462.21,3458.03 ; C14.2@4262.21,3308.03 U7.15@4262.21,3458.03 ; C19.2@5062.21,3308.03 U8.15@5062.21,3458.03
  Top Layer w50: Q3.3@2364.61,3448.23 2412.21,3448.24 2412.21,3658.03 2412.21,3728.03 5062.21,3728.03 U8.15@5062.21,3458.03 ; CN11.3@3262.21,3658.03 3262.21,3728.03 ; CN10.2@3637.21,3658.03 3637.21,3728.03
  Bottom Layer w20: DC1.2@2131.91,2788.53 3287.71,2788.53 3312.21,2813.03 3352.21,2813.03 3376.91,2788.33 4427.01,2788.33 4462.21,2753.03 4462.21,2643.13 4497.01,2608.33 5207.71,2608.33 5218.21,2597.83 5218.21,2466.73 ; CN1.4@2211.17,2288.83 2211.21,2249.13 2229.21,2231.03 v1(2412.62,2231.03) v1(2512.99,2231.03) 3037.21,2231.03 v1(3037.21,2233.08) ; v1(2892.21,2588.08) 2892.21,2233.08 v1(3037.21,2233.08) ; v1@3037.21,2398.03 3037.21,2463.03 3082.21,2508.03 3462.31,2508.03 3514.21,2456.03 3514.21,2246.03 3552.21,2208.03 v1@3572.21,2208.03 ; v1(3347.21,2233.08) v1(3347.21,2398.08) v1(3037.21,2398.08) v1(3037.21,2233.08) ; v1(3572.21,2208.08) v1(3887.21,2208.08) ; v1(3572.21,2288.08) v1(3572.21,2448.08) ; v1@3887.21,2208.03 3887.21,1973.13 3942.31,1918.03 v1@4202.21,1918.03 ; v1(4202.21,1918.08) 5402.21,1918.08 5521.71,2037.58 v1(5521.71,2687.08)
  Bottom Layer w50: DC1.3@1994.11,2977.53 1994.11,3498.03 2162.21,3498.03 2162.21,3728.03 2412.21,3728.03 CN9.2@2412.21,3658.03
  other v1: 4142.21,1918.08 4142.21,2078.08 4182.21,2078.08 4162.21,2278.08 4162.21,2318.08 4262.21,2318.08 4262.21,2358.08 4262.21,2418.08 4262.21,2458.08 4262.21,2518.08 3892.21,2543.08 4262.21,2558.08 3727.21,2583.08 4262.21,2618.03 3662.21,2658.08 3712.21,2658.08 4262.21,2658.08 4262.21,2758.03 4082.21,2878.03 4262.21,2878.03 3612.21,2908.03 4912.21,2908.03 5012.21,2908.03 5112.21,2908.03 5212.21,2908.03 2162.21,3658.08 2212.21,3658.08 2262.21,3658.08 2862.21,3658.08 2912.21,3658.08 2962.21,3658.08 3812.21,3658.08 3862.21,3658.08 3912.21,3658.08 4412.21,3658.08 4462.21,3658.08 4512.21,3658.08 4962.21,3658.08 5012.21,3658.08 5062.21,3658.08 2162.21,3708.08 2212.21,3708.08 2262.21,3708.08 2862.21,3708.08 2912.21,3708.08 2962.21,3708.08 3812.21,3708.08 3862.21,3708.08 3912.21,3708.08 4412.21,3708.08 4462.21,3708.08 4512.21,3708.08 4962.21,3708.08 5012.21,3708.08 5062.21,3708.08
J4_2: J4.2 U6.2 | length 441.4
  Top Layer w5: U6.2@3462.21,2958.03 3517.21,3013.03 3817.21,3013.03 J4.2@3862.21,3058.03
J4_4: J4.4 U6.3 | length 512.6
  Top Layer w5: U6.3@3562.21,2957.93 3607.11,3002.93 3872.11,3002.93 3902.21,3033.03 3902.21,3117.93 J4.4@3862.21,3157.93
J4_6: J4.6 U6.4 | length 629.4
  Top Layer w5: U6.4@3662.21,2957.93 3662.21,2952.53 3706.81,2907.93 3872.11,2907.93 3922.21,2958.03 3922.21,3197.93 J4.6@3862.21,3257.93
J4_8: J4.8 U6.5 U6.6 | length 606.3
  Top Layer w5: U6.5@3762.21,2958.03 U6.6@3862.21,2958.03 ; U6.6@3862.21,2957.93 3912.21,3008.03 3912.21,3178.03 3882.31,3207.93 3842.31,3207.93 3812.21,3238.03 3812.21,3308.03 J4.8@3862.21,3357.93
J5_2: J5.2 U7.2 | length 441.4
  Top Layer w5: U7.2@4262.21,2958.03 4317.21,3013.03 4617.21,3013.03 J5.2@4662.21,3058.03
J5_4: J5.4 U7.3 | length 512.6
  Top Layer w5: U7.3@4362.21,2957.93 4407.11,3002.93 4672.11,3002.93 4702.21,3033.03 4702.21,3117.93 J5.4@4662.21,3157.93
J5_6: J5.6 U7.4 | length 629.4
  Top Layer w5: U7.4@4462.21,2957.93 4462.21,2952.53 4506.81,2907.93 4672.11,2907.93 4722.21,2958.03 4722.21,3197.93 J5.6@4662.21,3257.93
J5_8: J5.8 U7.5 U7.6 | length 606.3
  Top Layer w5: U7.5@4562.21,2958.03 U7.6@4662.21,2958.03 ; U7.6@4662.21,2957.93 4712.21,3008.03 4712.21,3178.03 4682.31,3207.93 4642.31,3207.93 4612.21,3238.03 4612.21,3308.03 J5.8@4662.21,3357.93
J6_2: J6.2 U8.2 | length 441.4
  Top Layer w5: U8.2@5062.21,2958.03 5117.21,3013.03 5417.21,3013.03 J6.2@5462.21,3058.03
J6_4: J6.4 U8.3 | length 512.6
  Top Layer w5: U8.3@5162.21,2957.93 5207.11,3002.93 5472.11,3002.93 5502.21,3033.03 5502.21,3117.93 J6.4@5462.21,3157.93
J6_6: J6.6 U8.4 | length 629.4
  Top Layer w5: U8.4@5262.21,2957.93 5262.21,2952.53 5306.81,2907.93 5472.11,2907.93 5522.21,2958.03 5522.21,3197.93 J6.6@5462.21,3257.93
J6_8: J6.8 U8.5 U8.6 | length 606.3
  Top Layer w5: U8.5@5362.21,2958.03 U8.6@5462.21,2958.03 ; U8.6@5462.21,2957.93 5512.21,3008.03 5512.21,3178.03 5482.31,3207.93 5442.31,3207.93 5412.21,3238.03 5412.21,3308.03 J6.8@5462.21,3357.93
KEY1_1: KEY1.1 KEY1.2 RN1.4 RN2.8 | length 667.5
  Top Layer w5: RN1.4@4409.41,2251.63 4409.41,2220.83 4422.91,2207.33 4548.61,2207.33 ; KEY1.2@4548.63,1855.12 KEY1.1@4548.63,2111.03 ; KEY1.1@4548.63,2111.03 4548.61,2299.43 4563.71,2314.53 RN2.8@4589.97,2314.53
KEY2_1: KEY2.1 KEY2.2 RN1.3 RN2.7 | length 852.5
  Top Layer w5: KEY2.1@4273.63,2111.03 4360.21,2111.03 4378.01,2128.83 4378.01,2251.63 4378.01,2273.83 4387.21,2283.03 4482.21,2283.03 4498.21,2299.03 4498.21,2344.03 4512.21,2358.03 4607.21,2358.03 4621.41,2343.83 RN2.7@4621.41,2314.53 ; KEY2.2@4273.63,1855.12 KEY2.1@4273.63,2111.03
P1_1: F1.2 P1.1 | length 377.8
  Top Layer w20: P1.1@2462.21,2518.03 2522.21,2518.03 2552.21,2548.03 2762.21,2548.03 2775.21,2561.03 F1.2@2775.21,2608.03
P5V: C10.1 CN11.2 D3.2 L1.2 U1.3 | length 1977.4
  Top Layer w20: D3.2@3062.21,2890.75 v1(3062.21,2968.08) ; CN11.2@3162.21,3658.03 3312.21,3508.03 v1(3312.21,3128.08)
  Top Layer w30: U1.3@2729.31,2783.03 2807.21,2783.03 2872.21,2848.03 2872.21,3048.03 2907.21,3083.03 2967.11,3083.03 3127.31,3083.03 3162.21,3048.13 3162.21,2972.83 3162.21,2918.03 3134.91,2890.73 D3.2@3062.21,2890.73
  Bottom Layer w20: v1@3062.21,2968.03 3237.21,2968.03 3257.21,2988.03 3257.21,3093.03 3292.21,3128.03 v1@3312.21,3128.03
PVCC: C4.1 C13.1 C14.1 C19.1 CN2.1 CN9.1 CN10.1 D4.1 DC1.4 R11.1 R13.2 U1.1 U6.16 U7.16 U8.16 | length 6170.5
  Top Layer w5: DC1.4@2230.33,2977.53 2230.31,2679.53 2242.21,2667.63 2982.21,2667.63 2997.21,2682.63 2997.21,2762.63 3017.61,2783.03 3257.21,2783.03 3267.21,2793.03 3267.21,2838.03 3277.21,2848.03 3297.21,2848.03 3307.21,2838.13 3307.21,2368.03 3332.21,2343.03 3432.71,2343.03 R11.1@3462.21,2372.63 ; R13.2@3247.64,3438.08 v1(3282.21,3438.08)
  Top Layer w30: DC1.4@2230.33,2977.53 2230.31,3056.23 2257.21,3083.03 C4.1@2387.21,3083.03 2467.31,3083.03 2487.21,3063.13 2487.21,3003.03 2507.01,2983.33 2707.01,2983.33 2729.71,2960.63 U1.1@2729.71,2883.33 ; C13.1@3462.21,3108.03 3362.21,3208.03 U6.16@3362.21,3458.03 3362.21,3558.03 3462.21,3658.03 CN10.1@3537.21,3658.03 ; U7.16@4162.21,3458.03 4162.21,3208.03 C14.1@4262.21,3108.03 ; U8.16@4962.21,3458.03 4962.21,3208.03 C19.1@5062.21,3108.03
  Top Layer w50: D4.1@2487.21,3440.73 2487.21,3597.63 2547.61,3658.03 CN2.1@2687.21,3658.03
  Bottom Layer w50: DC1.4@2230.33,2977.53 2230.31,3296.13 2312.21,3378.03 ; CN9.1@2312.21,3658.08 2312.21,3378.03 ; CN2.1@2687.21,3658.03 2687.21,3443.03 2622.21,3378.03 2312.21,3378.03